# Altium PCB Motion_Board_V2_PCB.PcbDoc (part 1 of 2)
Units mm, origin at the board's own origin, x right, y up, seen from the top; angles counter-clockwise.
Board outline 65.25 x 59.75 mm, 4 copper layers (Top Layer, GND, PWR, Bottom Layer), stack 0.603 mm thick; 136 components, 74 nets, 414 pads, 822 vias.
Unrouted connection lines stored in the file: 41.
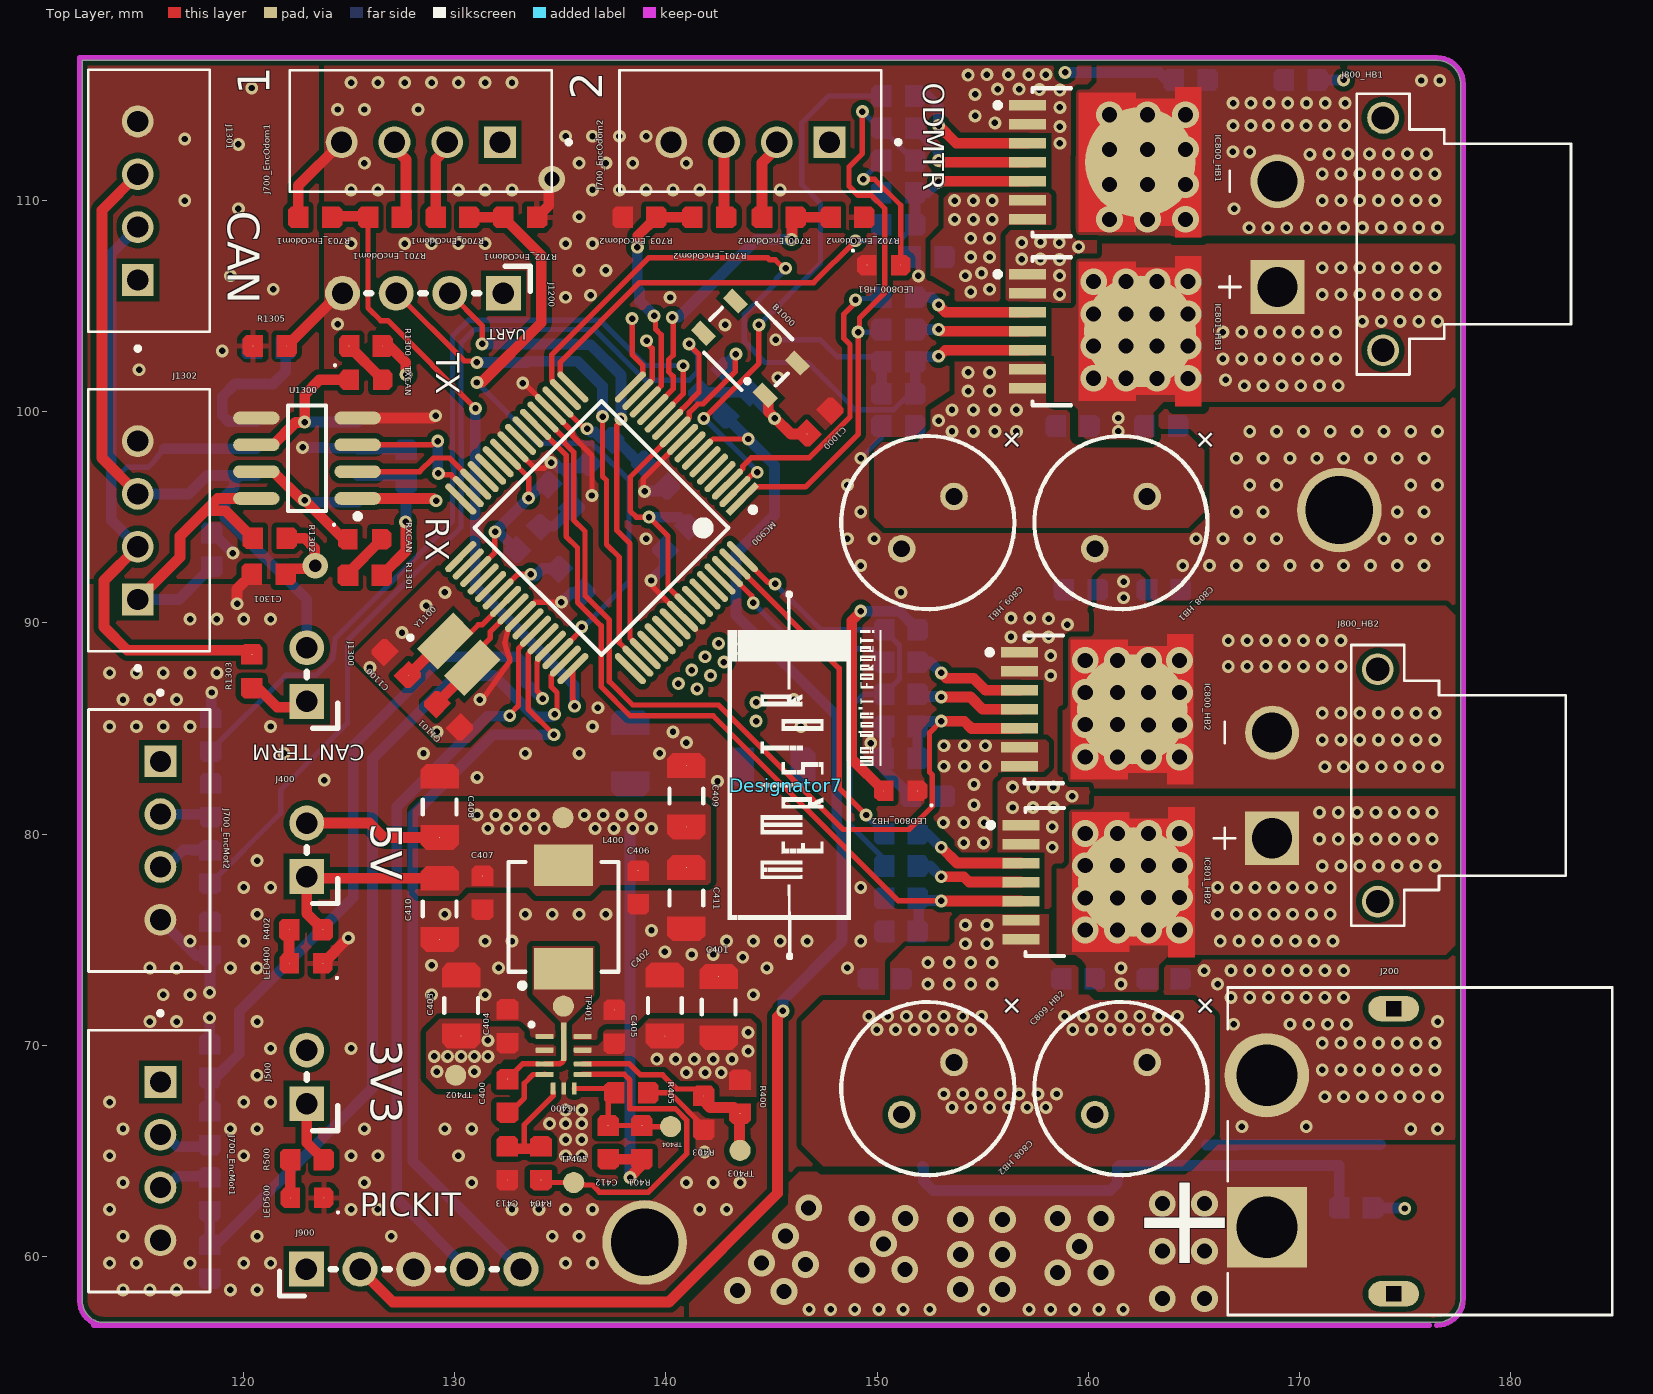
[diagram p0: Top Layer view]
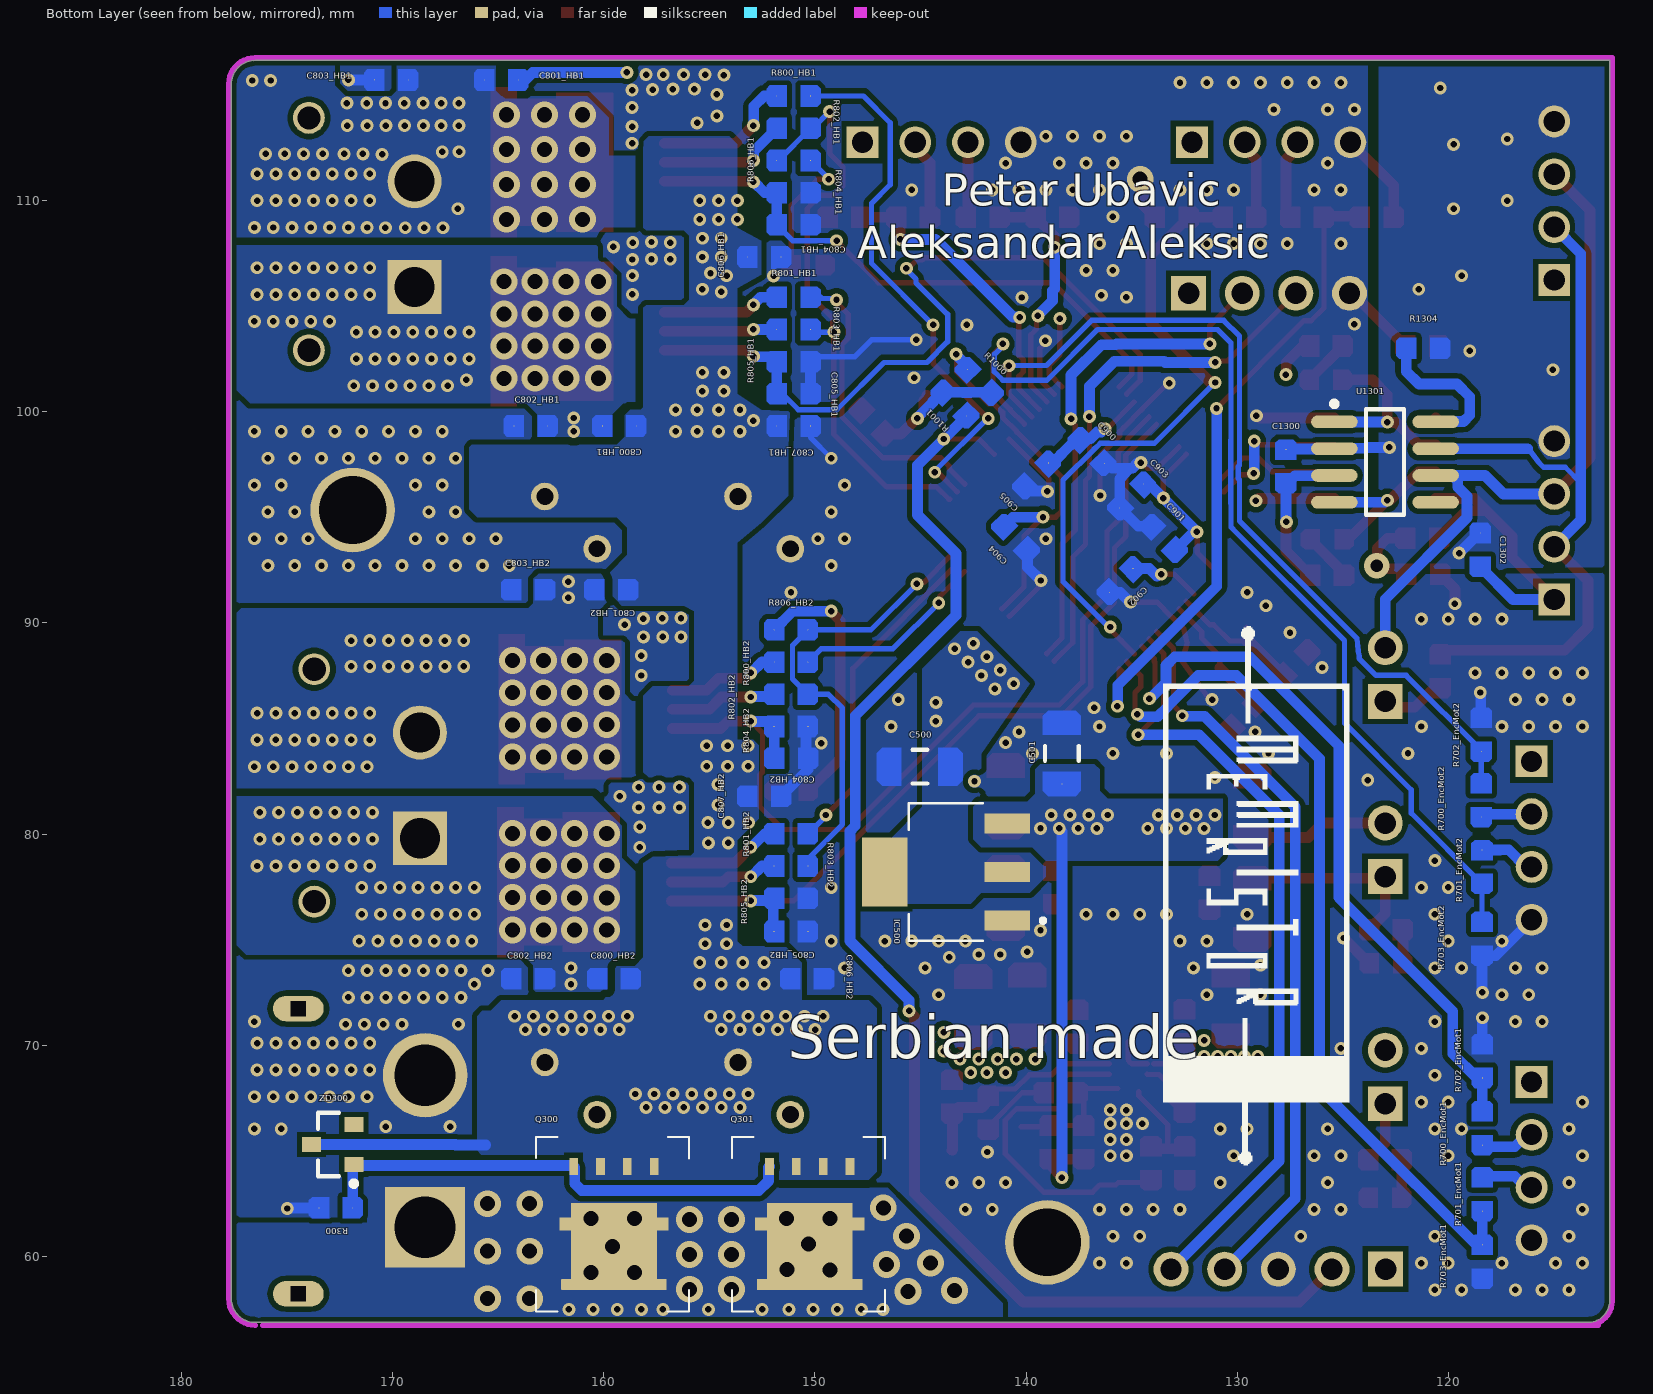
[diagram p1: Bottom Layer view, seen from below]
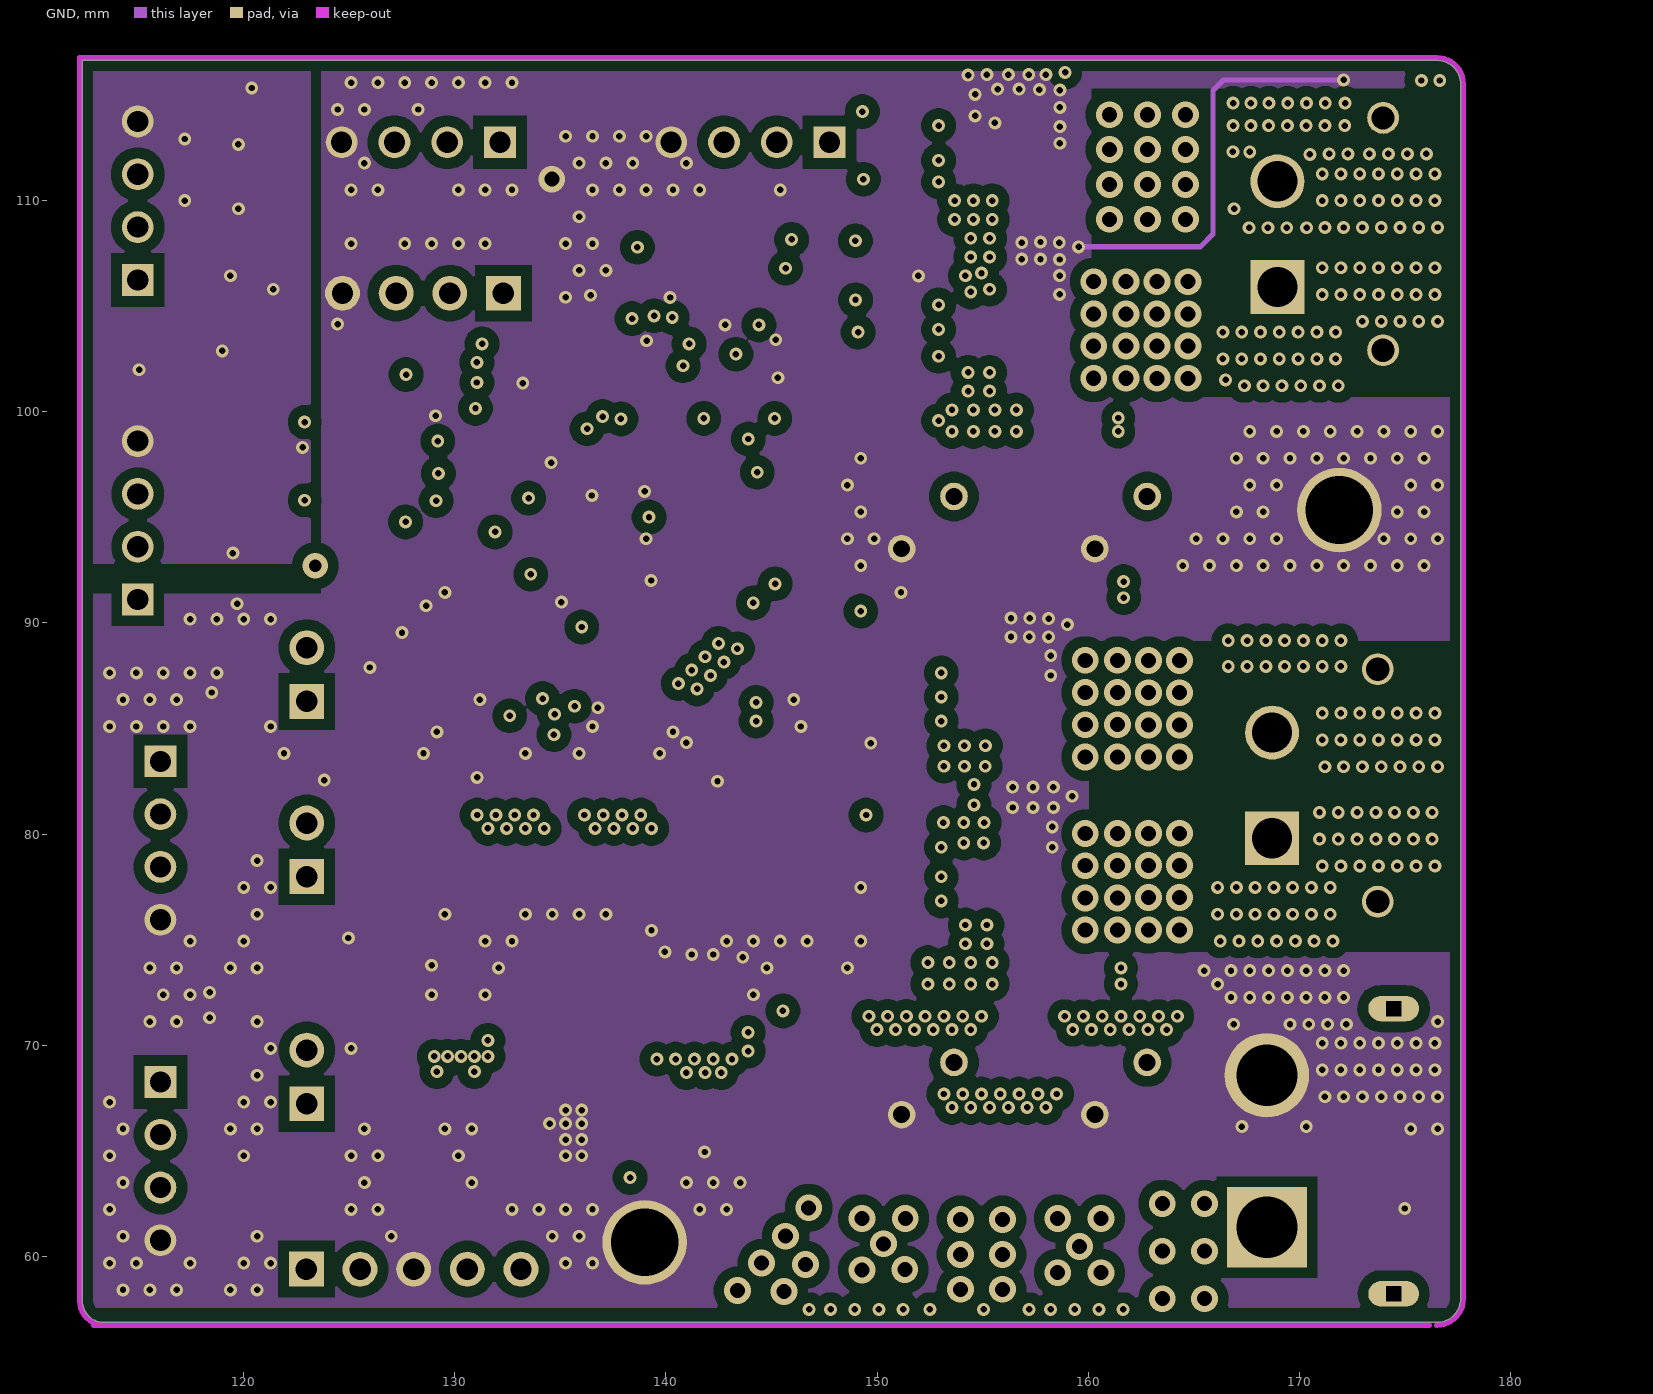
[diagram p2: GND]
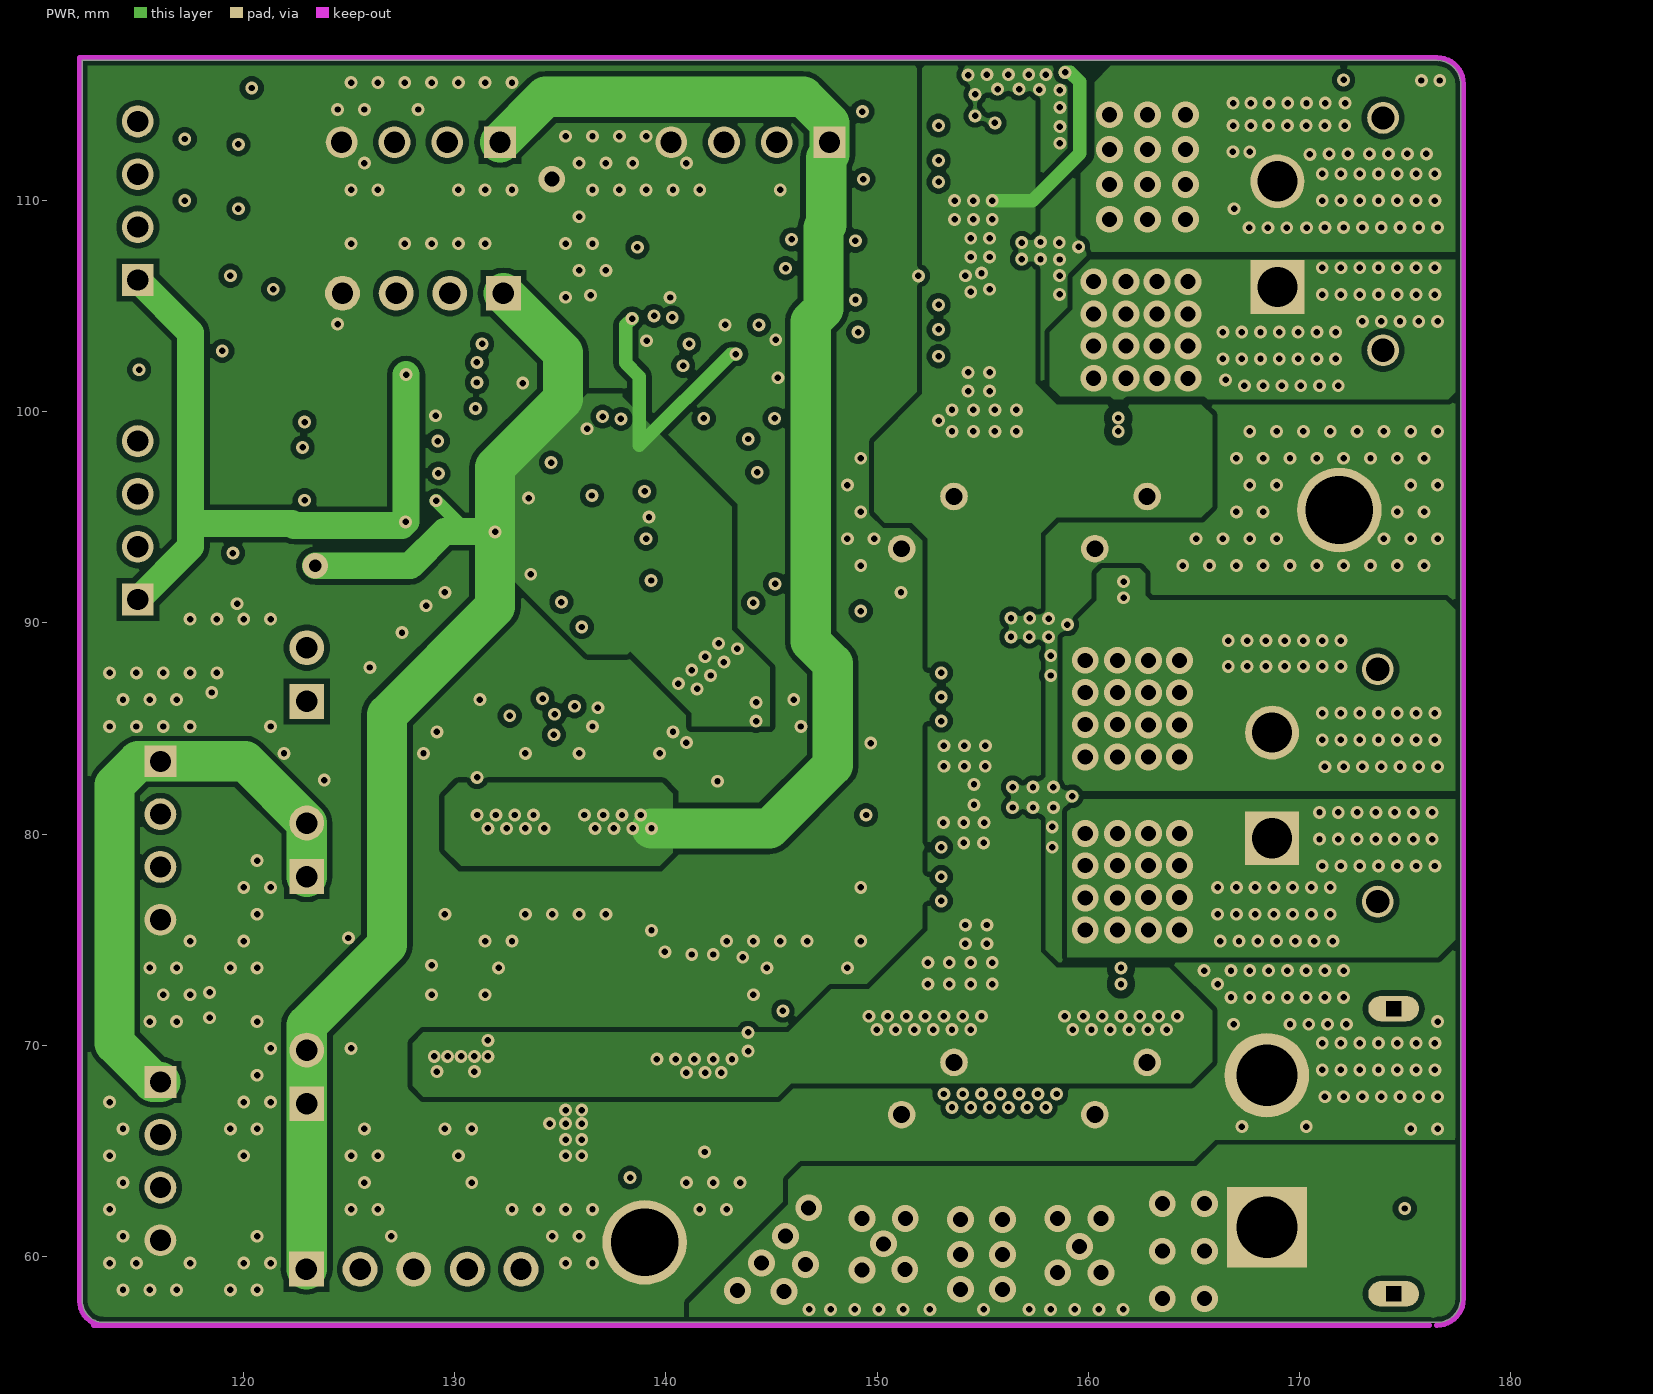
[diagram p3: PWR]
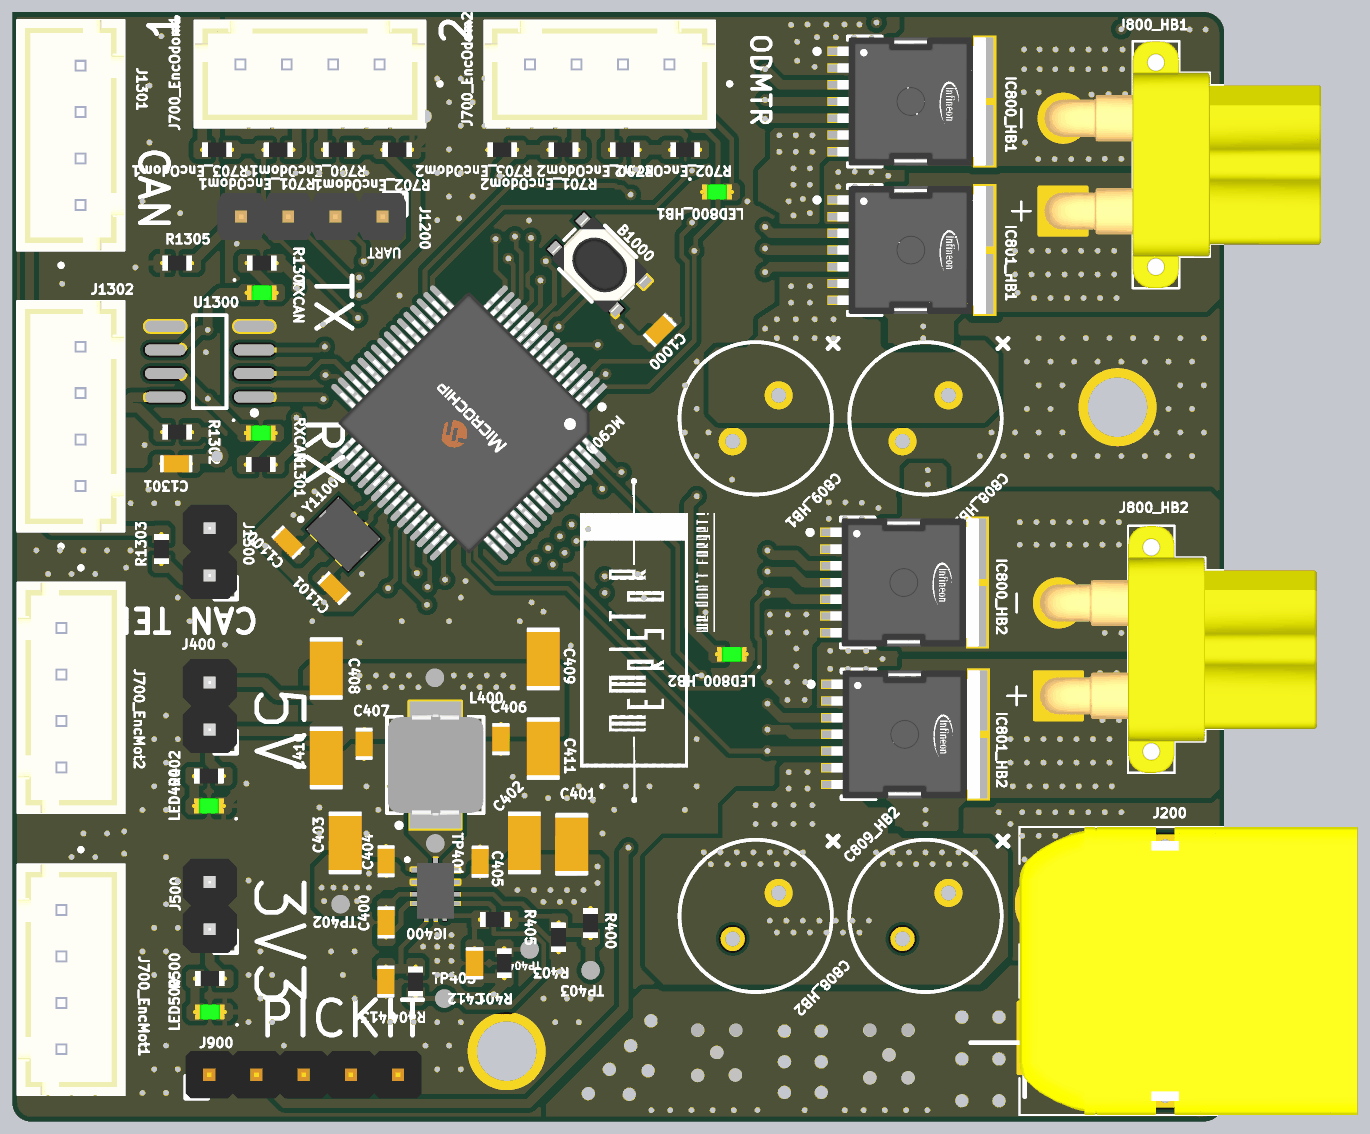
[diagram p5: 3D render of the assembled board from above, using the file's embedded part models]
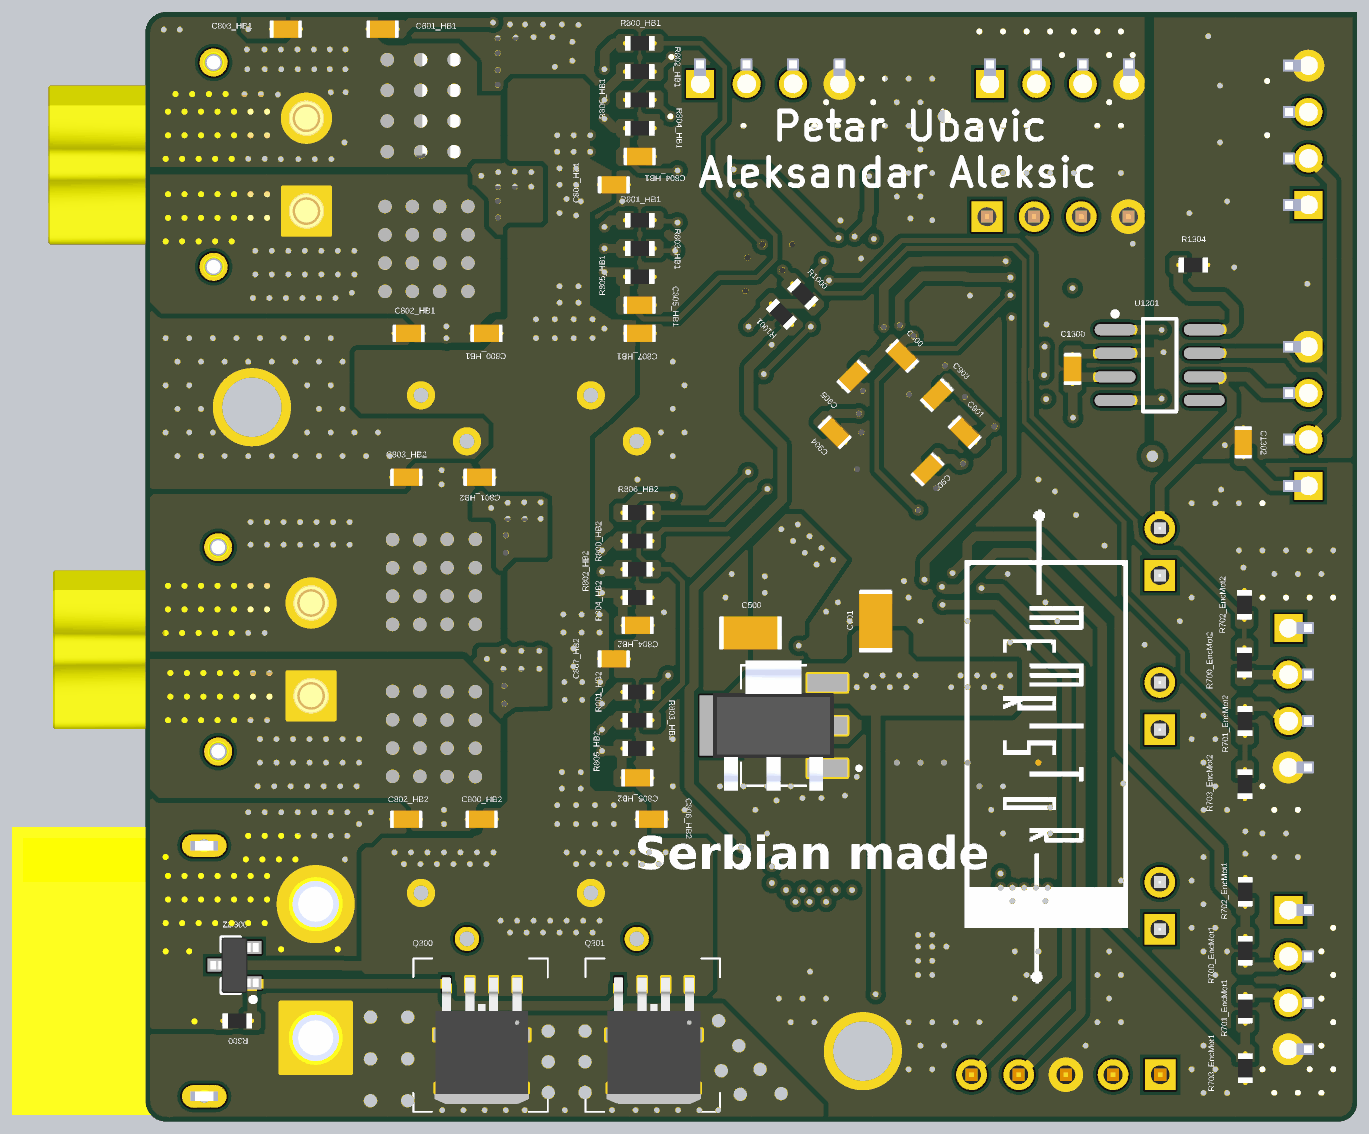
[diagram p6: 3D render of the assembled board from below, using the file's embedded part models]

## Layer stack, top to bottom
Top Solder: solder mask 0.0102, Solder Resist, Dk 3.5
Top Layer: signal copper 0.0356
Dielectric 2: prepreg 0.0711, PP-006, Dk 4.1
GND: signal copper 0.035
Dielectric 1: dielectric 0.32, FR-4, Dk 4.8
PWR: signal copper 0.035
Dielectric 3: prepreg 0.0711, PP-006, Dk 4.1
Bottom Layer: signal copper 0.0356
Bottom Solder: solder mask 0.0102, Solder Resist, Dk 3.5

## Board outline
112.377,57.9 ccw(c113.4,57.9) 113.4,56.877 176.5,56.877 ccw(c176.5,58) 177.623,58 177.623,115.5 ccw(c176.5,115.5) 176.5,116.623 112.377,116.623

## Design rules (kind name [scope] priority, off if disabled: settings)
Clearance "PWR clearance" [InNetClass('HIGH_PWR') vs InNetClass('HIGH_PWR')] p1: gap=0.381 ignorepadtopadclearanceinfootprint=FALSE
Clearance "GND Clearance" [OnLayer('GND')] p2: gap=0.508 ignorepadtopadclearanceinfootprint=FALSE
Clearance AleksicClearance [All] p3: gap=0.254 ignorepadtopadclearanceinfootprint=FALSE except(0: Arc-Hole Track-Hole SMDPad-Hole THPad-Hole Via-Hole Fill-Hole Poly-Hole Region-Hole Text-Hole; 0.102: Track-Track; 0.127: Track-SMDPad SMDPad-SMDPad SMDPad-Via; 0.381: Arc-Region Track-Fill Track-Region SMDPad-Fill SMDPad-Region THPad-Fill THPad-Region Via-Fill Via-Region Fill-Fill Fill-Region Poly-Region Region-Region; 0.5: THPad-THPad)
HoleSize [All] p1: absolutevalues=TRUE maxlimit=4 minlimit=0.025 maxpercent=80.000 minpercent=20.000
HoleToHoleClearance [All] p1: gap=0.152 allowstackedmicrovias=TRUE
MinimumSolderMaskSliver [All] p1: minsoldermaskwidth=0.152
PlaneConnect PlaneConnect_1 [InNet('GND')] p1: planeconnectstyle=Relief reliefexpansion=0.508 reliefentries=4 reliefconductorwidth=0.254 reliefairgap=0.254
PolygonConnect PolygonConnectThermalRelief [(InComponent('LED400') OR InComponent('LED500') OR InComponent('R1305') OR InComponent('R702_EncOdom1') OR InComponent('R702_EncOdom2'))] p1: connectstyle=Relief reliefconductorwidth=0.254 reliefentries=4 polygonreliefangle="90 Angle" airgapwidth=0.254
PolygonConnect [All] p2: connectstyle=Direct reliefconductorwidth=0.254 reliefentries=4 polygonreliefangle="90 Angle" airgapwidth=0.254
RoutingVias [All] p1: holewidth=0.711 width=1.27 viastyle="Through Hole" minholewidth=0.305 minwidth=0.61 maxholewidth=0.711 maxwidth=1.27
SilkToSilkClearance [All] p1: silktosilkclearance=0.152
SilkToSolderMaskClearance [IsPad] p1: minsilkscreentomaskgap=0.152 clearancetoexposedcopper=TRUE
SolderMaskExpansion [All] p1: expansion=0.102 istentingtop=FALSE
Width [All] p1: maxlimit=1.905 minlimit=0.152 preferedwidth=1.27 toplayer_maxwidth=0.508 toplayer_prefwidth=0.254 midlayer1_minwidth=0.254 midlayer1_maxwidth=0.762 midlayer1_prefwidth=0.508 midlayer2_minwidth=0.635 bottomlayer_maxwidth=0.508 bottomlayer_prefwidth=0.254 minimp=50.000000 maximp=50.000000 favimp=50.000000
24 further rules are at their usual default settings.

## Classes and differential pairs
net class HIGH_PWR: HBRIN_HB1 MOTOR1_HB1 MOTOR1_HB2 MOTOR2_HB1 MOTOR2_HB2 NetJ200_2
channel class HBridge: HB1 HB2
channel class Encoder: EncMot1 EncMot2 EncOdom1 EncOdom2
net class ISB[1..2]: ISB1 ISB2
net class ISA[1..2]: ISA1 ISA2
net class INH[1..2]: INH1 INH2
net class INB[1..2]: INB1 INB2
net class INA[1..2]: INA1 INA2
component class U_REVERSE_PROTECTION: Q300 Q301 R300 ZD300
component class U_Power: J200
component class U_PIC32MK: C900 C901 C902 C903 C904 C905 J900 MC900
component class U_MCLR: B1000 C1000 R1000 R1001
component class U_LDO: C500 C501 IC500 J500 LED500 R500
component class U_Communication: J1200
component class U_CAN: C1300 C1301 C1302 J1300 J1301 J1302 R1300 R1301 R1302 R1303 R1304 R1305 RXCAN TXCAN U1300 U1301
component class U_5V0_SYS_SUPPLY: C400 C401 C402 C403 C404 C405 C406 C407 C408 C409 C410 C411 C412 C413 IC400 J400 L400 LED400 R400 R401 R402 R403 R404 R405 TP400 TP401 TP402 TP403 TP404 TP405 TP4001
component class Oscillator: C1100 C1101 Y1100
component class HB2: C800_HB2 C801_HB2 C802_HB2 C803_HB2 C804_HB2 C805_HB2 C806_HB2 C807_HB2 C808_HB2 C809_HB2 IC800_HB2 IC801_HB2 J800_HB2 LED800_HB2 R800_HB2 R801_HB2 R802_HB2 R803_HB2 R804_HB2 R805_HB2 R806_HB2
component class HB1: C800_HB1 C801_HB1 C802_HB1 C803_HB1 C804_HB1 C805_HB1 C806_HB1 C807_HB1 C808_HB1 C809_HB1 IC800_HB1 IC801_HB1 J800_HB1 LED800_HB1 R800_HB1 R801_HB1 R802_HB1 R803_HB1 R804_HB1 R805_HB1 R806_HB1
component class EncOdom2: J700_EncOdom2 R700_EncOdom2 R701_EncOdom2 R702_EncOdom2 R703_EncOdom2
component class EncOdom1: J700_EncOdom1 R700_EncOdom1 R701_EncOdom1 R702_EncOdom1 R703_EncOdom1
component class EncMot2: J700_EncMot2 R700_EncMot2 R701_EncMot2 R702_EncMot2 R703_EncMot2
component class EncMot1: J700_EncMot1 R700_EncMot1 R701_EncMot1 R702_EncMot1 R703_EncMot1

## Components (designator, comment, footprint, x,y, rotation, side; value= is the part's Value field where it differs from the comment)
B1000 "434133025816" 434133025816 144,103 r135 top
C400 "0.1uF" CAP_0603 132.5,67.6 r90 top
C401 "10uF" CAP_1206 142.494,71.808 r270 top
C402 "10uF" CAP_1206 139.954,71.882 r270 top
C403 "10uF" CAP_1206 130.302,71.882 r270 top
C404 "0.1uF" CAP_0603 132.5,70.9 r270 top
C405 "0.1uF" CAP_0603 137.562,70.875 r270 top
C406 "100nf" CAP_0603 138.684,77.47 r90 top
C407 "100nf" CAP_0603 131.318,77.216 r90 top
C408 "22uF" CAP_1206 129.286,81.28 r270 top
C409 "22uF" CAP_1206 140.97,81.788 r270 top
C410 "22uF" CAP_1206 129.286,76.454 r90 top
C411 "22uF" CAP_1206 140.97,76.962 r90 top
C412 "82pF" CAP_0603 137.262,65.4 r270 top
C413 "1uf" CAP_0603 132.487,64.415 r90 top
C500 "1uF" CAP_1206 145.034,83.185 r180 bottom
C501 "1uF" CAP_1206 138.303,83.82 r90 bottom
C800_HB1 "10nF" CAP_0603 159.258,99.314 r180 bottom (schematic designator C800)
C800_HB2 "10nF" CAP_0603 159.512,73.152 r180 bottom (schematic designator C800)
C801_HB1 "10nF" CAP_0603 164.846,115.697 r180 bottom (schematic designator C801)
C801_HB2 "10nF" CAP_0603 159.639,91.567 r180 bottom (schematic designator C801)
C802_HB1 "10nF" CAP_0603 163.449,99.314 r180 bottom (schematic designator C802)
C802_HB2 "10nF" CAP_0603 163.576,73.152 r180 bottom (schematic designator C802)
C803_HB1 "10nF" CAP_0603 170.053,115.697 r180 bottom (schematic designator C803)
C803_HB2 "10nF" CAP_0603 163.576,91.567 r180 bottom (schematic designator C803)
C804_HB1 "1nF" CAP_0603 151.003,108.839 r0 bottom (schematic designator C804)
C804_HB2 "1nF" CAP_0603 151.117,83.591 r0 bottom (schematic designator C804)
C805_HB1 "1nF" CAP_0603 151.003,100.838 r0 bottom (schematic designator C805)
C805_HB2 "1nF" CAP_0603 151.13,75.387 r0 bottom (schematic designator C805)
C806_HB1 "100nf" CAP_0603 152.4,107.315 r0 bottom (schematic designator C806)
C806_HB2 "100nf" CAP_0603 150.368,73.152 r0 bottom (schematic designator C806)
C807_HB1 "10uF" CAP_0603 151.003,99.314 r0 bottom (schematic designator C807)
C807_HB2 "10uF" CAP_0603 152.4,81.788 r0 bottom (schematic designator C807)
C808_HB1 "470uF 25V" WCAP-ATG5_8X11.5(DXL) 161.544,94.742 r45 top locked (schematic designator C808)
C808_HB2 "470uF 25V" WCAP-ATG5_8X11.5(DXL) 152.4,67.95 r45 top locked (schematic designator C808)
C809_HB1 "470uF 25V" WCAP-ATG5_8X11.5(DXL) 152.4,94.742 r45 top locked (schematic designator C809)
C809_HB2 "470uF 25V" WCAP-ATG5_8X11.5(DXL) 161.544,67.95 r45 top locked (schematic designator C809)
C900 "100nf" CAP_0603 136.875,98.1 r45 bottom
C901 "100nf" CAP_0603 133.5,94 r225 bottom
C902 "100nf" CAP_0603 135.5,92 r135 bottom
C903 "100nf" CAP_0603 135,96 r135 bottom
C904 "100nf" CAP_0603 140.5,94 r45 bottom
C905 "100nf" CAP_0603 139.5,97 r135 bottom
C1000 "100nf" CAP_0603 147.25,99.5 r225 top
C1100 "10pF" CAP_0603 127.234,88.066 r135 top
C1101 "10pF" CAP_0603 129.7,85.6 r315 top
C1300 "100nf" CAP_0603 127.7,97.4 r270 bottom
C1301 "100nf" CAP_0603 121.2,92.3 r0 top
C1302 "100nf" CAP_0603 118.5,93.45 r270 bottom
Designator7 "Comment" Memristor_LOGO_middle 145.7,82.3 r90 top
IC400 "LMR33630CRNXR" VQFN-HR 135.162,69.2 r0 top
IC500 "TLV1117LV33DCYR" VREG_TLV1117LV33DCYR 143.8,78.2 r0 bottom
IC800_HB1 "BTN9970LVAUMA1" FP-PG-HSOF-7-MFG#1 160.804,111.8 r270 top locked (schematic designator IC800)
IC800_HB2 "BTN9970LVAUMA1" FP-PG-HSOF-7-MFG#1 160.425,85.9 r270 top locked (schematic designator IC800)
IC801_HB1 "BTN9970LVAUMA1" FP-PG-HSOF-7-MFG#2 160.804,103.8 r270 top locked (schematic designator IC801)
IC801_HB2 "BTN9970LVAUMA1" FP-PG-HSOF-7-MFG#1 160.475,77.725 r270 top locked (schematic designator IC801)
J200 "XT60 90 Deg" XT60PW-M 176.5,65 r270 top locked
J400 "*" HM1x2 123,79.25 r90 top
J500 "*" HM1x2 123,68.5 r90 top
J700_EncMot1 "4 PIN JST XH 2.5mm pitch" JST4PIN 115.162,64.516 r90 top (schematic designator J700)
J700_EncMot2 "4 PIN JST XH 2.5mm pitch" JST4PIN 115.162,79.691 r90 top (schematic designator J700)
J700_EncOdom1 "4 PIN JST XH 2.5mm pitch" JST4PIN 128.4,113.656 r0 top (schematic designator J700)
J700_EncOdom2 "4 PIN JST XH 2.5mm pitch" JST4PIN 144,113.656 r0 top (schematic designator J700)
J800_HB1 "XT30PW-F" AMASS_XT30PW-F 173.95,108.4 r270 top locked (schematic designator J800)
J800_HB2 "XT30PW-F" AMASS_XT30PW-F 173.7,82.3 r270 top locked (schematic designator J800)
J900 "HEADER5PIN" HEADER5PIN 126.79,59.4 r0 top
J1200 "UART" HM1X4 128.5,105.6 r180 top
J1300 "*" HM1x2 123,87.55 r90 top
J1301 "4 PIN JST XH 2.5mm pitch" JST4PIN 115.906,109.982 r270 top
J1302 "4 PIN JST XH 2.5mm pitch" JST4PIN 115.906,94.85 r270 top
L400 "2.2uH" INDP_518X518 135.15,76.075 r90 top
LED400 "GREEN LED" DIOC1608X04N 122.963,73.875 r0 top
LED500 "GREEN LED" DIOC1608X04N 123.013,62.775 r0 top
LED800_HB1 "RED LED" DIOC1608X04N-RED 150.299,106.934 r180 top (schematic designator LED800)
LED800_HB2 "RED LED" DIOC1608X04N-RED 151.13,82.042 r0 top (schematic designator LED800)
MC900 "PIC32MK1024MCF064" PIC32MK_64-TQFP 137,94.5 r225 top
Q300 "SQJ659EP PMOS" "PowerPAK SO-8L SINGLE" 159.512,61.468 r0 bottom
Q301 "SQJ659EP PMOS" "PowerPAK SO-8L SINGLE" 150.241,61.468 r0 bottom
R300 "47kOhm" RES_0603 172.675,62.3 r180 bottom
R400 "71.5kOhm" RES_0603 143.51,67.564 r90 top
R401 "100Kohm" RES_0603 138.862,65.4 r270 top
R402 "150" RES_0603 122.963,75.475 r0 top
R403 "10Kohm" RES_0603 141.787,66.8 r90 top
R404 "100Kohm" RES_0603 134.087,64.415 r90 top
R405 "24.9kOhm" RES_0603 138.362,67.75 r180 top
R500 "68" RES_0603 123.013,64.575 r0 top
R700_EncMot1 "2k" RES_0603 118.4,66.075 r270 bottom (schematic designator R700)
R700_EncMot2 "2k" RES_0603 118.45,81.6 r270 bottom (schematic designator R700)
R700_EncOdom1 "2k" RES_0603 129.9,109.2 r180 top (schematic designator R700)
R700_EncOdom2 "2k" RES_0603 145.35,109.2 r180 top (schematic designator R700)
R701_EncMot1 "2k" RES_0603 118.4,62.95 r90 bottom (schematic designator R701)
R701_EncMot2 "2k" RES_0603 118.418,78.441 r90 bottom (schematic designator R701)
R701_EncOdom1 "2k" RES_0603 126.7,109.2 r0 top (schematic designator R701)
R701_EncOdom2 "2k" RES_0603 142.05,109.2 r0 top (schematic designator R701)
R702_EncMot1 "3k9" RES_0603 118.4,69.25 r270 bottom (schematic designator R702)
R702_EncMot2 "3k9" RES_0603 118.45,84.7 r270 bottom (schematic designator R702)
R702_EncOdom1 "3k9" RES_0603 133.1,109.2 r180 top (schematic designator R702)
R702_EncOdom2 "3k9" RES_0603 148.6,109.2 r180 top (schematic designator R702)
R703_EncMot1 "3k9" RES_0603 118.4,59.75 r90 bottom (schematic designator R703)
R703_EncMot2 "3k9" RES_0603 118.418,75.041 r90 bottom (schematic designator R703)
R703_EncOdom1 "3k9" RES_0603 123.4,109.2 r0 top (schematic designator R703)
R703_EncOdom2 "3k9" RES_0603 138.75,109.2 r0 top (schematic designator R703)
R800_HB1 "1k" RES_0603 151.003,114.935 r180 bottom (schematic designator R800)
R800_HB2 "1k" RES_0603 151.13,88.138 r180 bottom (schematic designator R800)
R801_HB1 "1k" RES_0603 151.003,105.41 r180 bottom (schematic designator R801)
R801_HB2 "1k" RES_0603 151.13,80.01 r180 bottom (schematic designator R801)
R802_HB1 "1k" RES_0603 151.003,113.411 r180 bottom (schematic designator R802)
R802_HB2 "1k" RES_0603 151.13,86.614 r180 bottom (schematic designator R802)
R803_HB1 "1k" RES_0603 151.003,103.886 r180 bottom (schematic designator R803)
R803_HB2 "1k" RES_0603 151.13,78.486 r180 bottom (schematic designator R803)
R804_HB1 "1k" RES_0603 151.003,110.363 r180 bottom (schematic designator R804)
R804_HB2 "1k" RES_0603 151.13,85.09 r180 bottom (schematic designator R804)
R805_HB1 "1k" RES_0603 151.003,102.362 r180 bottom (schematic designator R805)
R805_HB2 "1k" RES_0603 151.13,76.962 r180 bottom (schematic designator R805)
R806_HB1 "1k" RES_0603 151.003,111.887 r180 bottom (schematic designator R806)
R806_HB2 "1k" RES_0603 151.13,89.662 r0 bottom (schematic designator R806)
R1000 "10k" RES_0603 142.219,101.43 r45 bottom
R1001 "1k" RES_0603 143.375,100.35 r45 bottom
R1300 "1k" RES_0603 125.8,103.1 r0 top
R1301 "1k" RES_0603 125.75,92.25 r0 top
R1302 "0" RES_0603 121.25,94 r180 top
R1303 "120" RES_0603 120.4,87.7 r270 top
R1304 "10k" RES_0603 121.2,103 r0 bottom
R1305 "0" RES_0603 121.25,103.1 r0 top
RXCAN "GREEN LED" DIOC1608X04N 125.75,93.95 r180 top
TP400 "Test point" TestPoint#1 135.128,80.772 r0 top
TP401 "Test point" TestPoint#2 135.375,71.775 r180 top
TP402 "Test point" TestPoint#1 130.048,68.58 r315 top
TP403 "Test point" TestPoint#1 143.51,65.024 r45 top
TP404 "Test point" TestPoint#1 140.227,66.148 r315 top
TP405 "Test point" TestPoint#1 135.636,63.5 r225 top
TXCAN "GREEN LED" DIOC1608X04N 125.8,101.5 r180 top
U1300 "ADUM1201BRZ-RL7" SOIC-8 123,97.8 r180 top
U1301 "SN65HVD230DR" SOIC-8 123,97.6 r180 bottom
Y1100 "CG04874-8M" XTALDFN320X250X100-2N 130.2,88.5 r315 top
ZD300 "DZ23C15-E3-08 Zener Diode" SOT95P245X96-3N 172.825,65.3 r0 bottom

## Footprints (in the part's own frame and the unit in brackets; to place one, negate y for a bottom-side part, rotate by r counter-clockwise, add the part's x,y. Pads: shape width x height; smd on the part's side, far side on the other; paste and mask are expansions set on the pad)
434133025816 [mm]
  rect 1.05x0.65 smd: 1(-2.075,1.075) 2(2.075,1.075) 3(-2.075,-1.075) 4(2.075,-1.075)
  silkscreen extent -2.1,-1.7 2.3,1.7, body extent -2.27,-1.6 2.27,1.6, height 2.5
AMASS_XT30PW-F [mm]
  round 2.55 hole 1.9: N(-2.5,-5)
  rect 2.55x2.55 hole 1.9: P(2.5,-5)
  round 1.508 hole 1.1: S1(5.5,0) S2(-5.5,0)
  silkscreen extent -6.65,-7.75 6.65,8.9, body extent -6.65,-6 6.65,8.9, height 5
CAP_0603 [mil] "Chip Capacitor, 2-Leads, Body 1.60x0.80mm, IPC Medium Density"
  round 1 smd: 1(-31.5,0) 2(31.5,0)
  Top Layer region: -50.2,-13.8 -50.2,13.8 -44.31,19.69 -12.8,19.69 -12.8,-19.69 -44.31,-19.69
  Top Layer region: 12.8,-19.69 12.8,19.69 44.31,19.69 50.2,13.8 50.2,-13.8 44.31,-19.69
  body extent -34,-19 34,19, height 31
CAP_1206 [mil] "Chip Capacitor, 2-Leads, Body 3.20x1.60mm, IPC Medium Density"
  round 1 smd: 1(-57.09,0) 2(57.09,0)
  Top Layer region: -79.72,-25.28 -79.72,25.28 -69.57,35.43 -34.45,35.43 -34.45,-35.43 -69.57,-35.43
  Top Layer region: 34.45,-35.43 34.45,35.43 69.57,35.43 79.72,25.28 79.72,-25.28 69.57,-35.43
  silkscreen extent -14,-31 14,31, body extent -67,-35 67,35, height 35
DIOC1608X04N [mil] "Chip Diode, 2-Leads, Body 1.60x0.80mm, IPC Medium Density"
  round 1 smd: 1(-31.5,0) 2(31.5,0)
  Top Layer region: 13.78,-18.7 42.13,-18.7 49.21,-11.61 49.21,11.61 42.13,18.7 13.78,18.7
  Top Layer region: -49.21,-11.61 -42.13,-18.7 -13.78,-18.7 -13.78,18.7 -42.13,18.7 -49.21,11.61
  silkscreen extent 56,-29 60,-25, body extent -31,-16 31,16, height 31
DIOC1608X04N-RED [mil] "Chip Diode, 2-Leads, Body 1.60x0.80mm, IPC Medium Density"
  round 1 smd: 1(-32.24,0) 2(30.75,0)
  Top Layer region: 13.03,-18.7 41.38,-18.7 48.46,-11.61 48.46,11.61 41.38,18.7 13.03,18.7
  Top Layer region: -49.96,-11.61 -42.87,-18.7 -14.53,-18.7 -14.53,18.7 -42.87,18.7 -49.96,11.61
  silkscreen extent 55,-29 59,-25, body extent -32,-16 31,16, height 31
FP-PG-HSOF-7-MFG#1 [mm]
  rect 0.5x1.75 smd paste-1000 mask+0: 1(-2.7,-3.675) 2(-1.8,-3.675) 3(-0.9,-3.675) 4(0,-3.675) 5(0.9,-3.675) 6(1.8,-3.675) 7(2.7,-3.675)
  round 5.22 smd paste-1000 mask+0: 8(0,1.65)
  Top Layer region: -3.3,-1.25 3.3,-1.25 3.3,1.45 3,1.45 3,3.3 3.55,3.3 3.55,4.55 -3.55,4.55 -3.55,3.3 -3,3.3 -3,1.45 -3.3,1.45
  silkscreen extent -3.5,-5.22 3.5,-1.63, body extent -3.65,-4.65 3.65,4.65, height 0.25
FP-PG-HSOF-7-MFG#2 [mm]
  rect 0.5x1.75 smd paste-1000 mask+0: 1(-2.7,-3.675) 2(-1.8,-3.675) 3(-0.9,-3.675) 4(0,-3.675) 5(0.9,-3.675) 6(1.8,-3.675) 7(2.7,-3.675)
  round 5.3 smd paste-1000 mask+0: 8(0,1.65)
  Top Layer region: -3.3,-1.25 3.3,-1.25 3.3,1.45 3,1.45 3,3.3 3.55,3.3 3.55,4.55 -3.55,4.55 -3.55,3.3 -3,3.3 -3,1.45 -3.3,1.45
  silkscreen extent -3.5,-5.22 3.5,-1.63, body extent -3.65,-4.65 3.65,4.65, height 0.25
HEADER5PIN [mil]
  rect 65x65 hole 40: 1(-150,0)
  round 65 hole 40: 2(-50,0) 3(50,0) 4(150,0) 5(250,0)
  silkscreen extent -200,-50 105,0, body extent -200,-50 300,50, height 350
HM1x2 [mil]
  rect 65x65 hole 40: 1(-50,0)
  round 65 hole 40: 2(50,0)
  silkscreen extent -100,-57 5,0, body extent -100,-57 100,57, height 335
HM1X4 [mil]
  rect 65x65 hole 40: 1(-150,0)
  round 65 hole 40: 2(-50,0) 3(50,0) 4(150,0)
  silkscreen extent -200,-50 105,0, body extent -200,-50 200,50, height 336
INDP_518X518 [mm]
  rect 1.95x2.8 smd: 1(-2.45,0) 2(2.45,0)
  silkscreen extent -3.37,-2.6 2.6,2.6, body extent -2.73,-2.59 2.73,2.56, height 1.95
JST4PIN [mm]
  rect 1.508x1.508 hole 1: 1(3.75,-0.906)
  round 1.508 hole 1: 2(1.25,-0.906) 3(-1.25,-0.906) 4(-3.75,-0.906)
  silkscreen extent -6.2,-3.26 7.1,2.49, body extent -6.2,-3.26 6.2,2.49, height 7
Memristor_LOGO_middle [mm]
  silkscreen extent -8.26,-4.5 9.22,2.74
PIC32MK_64-TQFP [mil] "PIC32MK1024MCM064 / & / PIC32MK1024MCF064 / 64-TQFP Package"
  rect 76.98x12.3 smd paste+0 mask+0: 1(-222.03,146.54)
  rrect100% 76.98x12.3 smd paste+0 mask+0: 2(-222.03,126.85) 3(-222.03,107.17) 4(-222.03,87.48) 5(-222.03,67.8) 6(-222.03,48.11) 7(-222.03,28.43) 8(-222.03,8.74) 9(-222.03,-10.94) 10(-222.03,-30.63) 11(-222.03,-50.32) 12(-222.03,-70) 13(-222.03,-89.69) 14(-222.03,-109.37) 15(-222.03,-129.06) 16(-222.03,-148.74) 33(224.86,-148.74) 34(224.86,-129.06) 35(224.86,-109.37) 36(224.86,-89.69) 37(224.86,-70) 38(224.86,-50.32) 39(224.86,-30.63) 40(224.86,-10.94) 41(224.86,8.74) 42(224.86,28.43) 43(224.86,48.11) 44(224.86,67.8) 45(224.86,87.48) 46(224.86,107.17) 47(224.86,126.85) 48(224.86,146.54)
  rrect100% 12.3x76.98 smd paste+0 mask+0: 17(-146.22,-224.55) 18(-126.54,-224.55) 19(-106.85,-224.55) 20(-87.17,-224.55) 21(-67.48,-224.55) 22(-47.8,-224.55) 23(-28.11,-224.55) 24(-8.43,-224.55) 25(11.26,-224.55) 26(30.94,-224.55) 27(50.63,-224.55) 28(70.31,-224.55) 29(90,-224.55) 30(109.68,-224.55) 31(129.37,-224.55) 32(149.06,-224.55) 49(149.06,222.34) 50(129.37,222.34) 51(109.68,222.34) 52(90,222.34) 53(70.31,222.34) 54(50.63,222.34) 55(30.94,222.34) 56(11.26,222.34) 57(-8.43,222.34) 58(-28.11,222.34) 59(-47.8,222.34) 60(-67.48,222.34) 61(-87.17,222.34) 62(-106.85,222.34) 63(-126.54,222.34) 64(-146.22,222.34)
  silkscreen extent -227,-168 169,179, body extent -280,-283 283,281, height 10
"PowerPAK SO-8L SINGLE" [mm]
  rrect0% 0.595x0.61 smd: D(-2.286,-0.076) D(2.286,-0.076)
  rrect10% 5x0.51 smd: D(0,2.794)
  rrect0% 4.061x3.63 smd: D(0,0.762)
  rrect0% 0.41x0.82 smd: G(1.905,-2.791) S(-1.905,-2.791) S(-0.635,-2.791) S(0.635,-2.794)
  silkscreen extent -3.56,-4.19 3.68,4.06, body extent -2.54,-3.15 2.54,3.66, height 1.2
RES_0603 [mil] "Chip Resistor, 2-Leads, Body 1.60x0.80mm, IPC Medium Density"
  round 1 smd: 1(-31.5,0) 2(31.5,0)
  Top Layer region: 12.8,-19.69 12.8,19.69 44.31,19.69 50.2,13.8 50.2,-13.8 44.31,-19.69
  Top Layer region: -50.2,-13.8 -50.2,13.8 -44.31,19.69 -12.8,19.69 -12.8,-19.69 -44.31,-19.69
  body extent -31,-16 31,16, height 18
SOIC-8 [mm]
  oval 2.2x0.6 smd: 1(-2.409,1.914) 2(-2.409,0.644) 3(-2.409,-0.626) 4(-2.409,-1.896) 5(2.391,-1.896) 6(2.391,-0.626) 7(2.391,0.644) 8(2.391,1.914)
  silkscreen extent -2.53,-2.49 0.89,2.89, body extent -2.84,-2.45 2.93,2.45, height 1.45
SOT95P245X96-3N [mm] "SOT23, 3-Leads, Body 2.90x2.45mm, Pitch 0.95mm, IPC Medium Density"
  rect 0.9x0.7 smd: 1(-1,0.95) 2(-1,-0.95) 3(1,0)
  silkscreen extent -1.12,-1.5 0.7,1.97, body extent -1.3,-1.5 1.3,1.5, height 0.96
TestPoint#1 [mm] "1mm"
  round 1 smd mask+0: 1(0,0)
TestPoint#2 [mm] "1mm"
  round 1 smd mask+0: 1(0.225,-0.076)
VQFN-HR [mm]
  rrect25% 0.85x0.25 smd mask+0.07: 1(-0.9,1.219) 2(-0.9,0.569) 10(0.9,0.569) 11(0.9,1.219)
  rrect25% 0.85x0.229 smd mask+0.051: 3(-0.9,-0.081) 9(0.9,-0.081)
  rrect25% 0.85x0.226 smd mask+0.051: 4(-0.9,-0.581) 8(0.9,-0.581)
  rrect25% 0.229x0.559 smd mask+0.051: 5(-0.5,-1.245) 7(0.5,-1.244)
  rrect25% 0.229x0.584 smd mask+0.051: 6(0,-1.245)
  rrect25% 0.25x1.825 smd mask+0.07: 12(0,0.969)
  silkscreen extent -1.58,1.72 -1.46,1.84, body extent -1,-1.4 1,1.6, height 1
VREG_TLV1117LV33DCYR [mm]
  rect 2.15x0.95 smd: 1(-2.9,2.3) 2(-2.9,0) 3(-2.9,-2.3)
  rect 2.15x3.25 smd: 4(2.9,0)
  silkscreen extent -4.7,-3.25 1.75,3.25, body extent -3.5,-3.25 3.5,3.25, height 1.8
WCAP-ATG5_8X11.5(DXL) [mm]
  round 1.308 hole 0.8: 1(1.75,0) 2(-1.75,0)
  silkscreen extent -4.1,-4.1 4.1,4.1, body extent -3.99,-4 3.99,3.98, height 11.39
XT60PW-M [mm] "XT60 90 Deg"
  round 4 hole 2.9: 1(-3.584,-8.048)
  rect 3.8x3.8 hole 2.9: 2(3.616,-8.048)
  oval 1.2x2.4 hole 0.7 square: S1(6.766,-2.048) S2(-6.734,-2.048)
  silkscreen extent -7.73,-9.9 7.77,8.3, body extent -7.73,-9.9 7.77,8.3, height 8.4
XTALDFN320X250X100-2N [mm]
  rect 1.37x2.43 smd: 1(-0.9,0) 2(0.9,0)
  silkscreen extent -2.29,-1.16 -2.09,-0.96, body extent -1.6,-1.25 1.6,1.25, height 1

## Part data
B1000: "<b> WS-TASV J-Bend SMT Tact Switch 4.2x3.2 mm  <br> <br> MATERIAL PROPERTIES  <br><br> </b>Cover Material Stainless Steel  <br> <br> <b>PROPERTIES  <br><br> </b>Actuator Material LCP  <br>Actuator Flammability Rating UL94 V-0  <br>Actuator Color Black; White  <br>Frame Material LCP  <br>Frame Flammability Rating UL94 V-0  <br>Frame Color Black  <br>Contact Material Stainless Steel  <br>Contact Plating Silver  <br>Terminal Material Copper Alloy  <br>Terminal Plating Silver  <br>VR 16 V (DC)  <br>Contact Resistance Initial 500 mÎ©  <br>Contact Resistance After Life Test 1 Î©  <br>RISO 100 MÎ©  <br>Withstanding Voltage 250 V (AC)  <br>Qty. 2900  <br><br> <b>Mechanical Properties</b><br> <br>Stroke  0.2 mm  <br><br> <b>GENERAL INFORMATION  <br><br> </b>Operating Temperature -40 up to +85 Â°C  <br> <br> </b>PACKAGING PROPERTIES  <br><br> </b>Packaging Tape and Reel  <br> <br> <br><a href=\"https://www.we-online.com/catalog/media/o106805v209%20Family_WS-TASV-4341x30258x6_Gruppe.jpg\" title=\"Enlarge picture\"> <img src=\"https://www.we-online.com/catalog/media/o106805v209%20Family_WS-TASV-4341x30258x6_Gruppe.jpg\" width=\"320\"></a><p> Details see: <a href=\"https://www.we-online.com/catalog/en/TASV_4_2X3_2_SMD_J-BEND/\">https://www.we-online.com/catalog/en/TASV_4_2X3_2_SMD_J-BEND/</a><p> </b>Created by Yingchun,Shan 2020-02-20<br> </b>2020(C) Wurth Elektronik", Package=None, Availability=Unavailable, MF="{'manufacturer': u'Wurth Electronics'}", MP=434133025816, Price=None
C400 C404 C405: library part C000018, "CAP CER 0.1UF 50V X7R 0603", DigiKey part number=1276-1000-1-ND, capacitance=0.1uF, ComponentLink1Description=DigiKey, ComponentLink1URL=https://www.digikey.com/en/products/detail/samsung-electro-mechanics/CL10B104KB8NNNC/3886658
C401 C402 C403: library part C000017, "CAP CER 10UF 50V X7R 1206", DigiKey part number=1276-6767-1-ND, capacitance=10uF, ComponentLink1Description=DigiKey, ComponentLink1URL=https://www.digikey.com/en/products/detail/samsung-electro-mechanics/CL31B106KBHNNNE/5961251
C406 C407 C806_HB1 C806_HB2 C900 C901 C902 C903 C904 C905 C1000 C1300 C1301 C1302: library part C000007, "CAP CER 100nF 0603 25V X7R", capaticanse=100nf, ComponentLink1Description=digikey, ComponentLink1URL=https://www.digikey.com/en/products/detail/kyocera-avx/06033C104K4T2A/8019250
C408 C409 C410 C411: library part C000020, "22 µF ±10% 25V Ceramic Capacitor X5R 1206 (3216 Metric)", DigiKey part number=1276-3047-1-ND, capacitance=22uF, ComponentLink1Description=DigiKey, ComponentLink1URL=https://www.digikey.com/en/products/detail/samsung-electro-mechanics/CL31A226KAHNNNE/3888705
C412: library part C000021, "82 pF ±1% 25V Ceramic Capacitor C0G, NP0 0603 (1608 Metric)", DigiKey part number=478-KGM15ACG1E820FTCT-ND, capacitance=82pF, ComponentLink1Description=DigiKey, ComponentLink1URL=https://www.digikey.com/en/products/detail/kyocera-avx/KGM15ACG1E820FT/1599315?s=N4IgjCBcoMxaBjKAzAhgGwM4FMA0IB7KAbXDBggF18AHAFyhAGU6AnASwDsBzEAX3xgALPBBJIaLHkIlwAVgCcAJiEB2ENRD1GLDj36CAbKPGSc%2BIpFIxlQ45u2RmbLrwEglABiEKTKDOYyViAAHEoABDQAYhq0DE4AqpzsdADyyACy2KiYAK6s2AYgALRKfpBsudKWpHIafA1AA
C413: library part C000011, "CAP CER 1uF 10V X7R 0603", DigiKey part number=1276-1946-2-ND, capaticanse=1uf, ComponentLink1Description=digikey, ComponentLink1URL=https://www.digikey.com/en/products/detail/samsung-electro-mechanics/CL10B105KP8NNNC/3887604
C500 C501: library part C000020, "1 µF ±10% 25V Ceramic Capacitor X5R 1206 (3216 Metric)", capacitance=22uF, DigiKey part number=1276-3047-1-ND, ComponentLink1Description=DigiKey, ComponentLink1URL=https://www.digikey.com/en/products/detail/samsung-electro-mechanics/CL31A226KAHNNNE/3888705
C800_HB1 C800_HB2 C801_HB1 C801_HB2 C802_HB1 C802_HB2 C803_HB1 C803_HB2: library part C000007, "CAP CER 10nF 0603 25V X7R", capaticanse=100nf, ComponentLink1Description=digikey, ComponentLink1URL=https://www.digikey.com/en/products/detail/kyocera-avx/06033C104K4T2A/8019250
C804_HB1 C804_HB2 C805_HB1 C805_HB2: library part C000021, "CAP CER 1nF 0603 25V X7R", capacitance=82pF, DigiKey part number=478-KGM15ACG1E820FTCT-ND, ComponentLink1Description=DigiKey, ComponentLink1URL=https://www.digikey.com/en/products/detail/kyocera-avx/KGM15ACG1E820FT/1599315?s=N4IgjCBcoMxaBjKAzAhgGwM4FMA0IB7KAbXDBggF18AHAFyhAGU6AnASwDsBzEAX3xgALPBBJIaLHkIlwAVgCcAJiEB2ENRD1GLDj36CAbKPGSc%2BIpFIxlQ45u2RmbLrwEglABiEKTKDOYyViAAHEoABDQAYhq0DE4AqpzsdADyyACy2KiYAK6s2AYgALRKfpBsudKWpHIafA1AA
C807_HB1 C807_HB2: library part C000007, "CAP CER 10uF 0603 25V X7R", capaticanse=100nf, ComponentLink1Description=digikey, ComponentLink1URL=https://www.digikey.com/en/products/detail/kyocera-avx/06033C104K4T2A/8019250
C808_HB1 C808_HB2 C809_HB1 C809_HB2: library part WCAP-ATG5_8X11.5, "<b>WCAP-ATG5 Aluminium Electrolytic Capacitors </B><BR><BR> <B>General Purpose +105 Â°C </B><BR><BR> <B>Characteristics</B><BR> <BR>General purpose product series with max. operating temperature of +105 Â°C  <BR>Mounting style: THT Radial  <BR>Capacitance range: 0.1 ÂµF â€’ 18000 ÂµF  <BR>Capacitance tolerance: Â±20 %  <BR>Operating temperature:  <BR>-40 Â°C up to +105 Â°C for UR < 400 V(DC)  <BR>-25 Â°C up to +105 Â°C for UR â‰¥ 400 V(DC)  <BR>Endurance: 2000 h @ +105 Â°C  <BR>Dimensions (DxL) in mm: 5.0 x 11.0 up to 22.0 x 31.0  <BR>Recommended soldering: Wave soldering  <BR> <BR> <B>Applications</B><BR> <BR>Filtering  <BR>Smoothing  <BR>Energy storage  <BR>Coupling  e.g. Switched-mode power supply, AC/DC converter, adapter, charger, digital camera  <BR> <BR><BR> <BR> <br><a href=\"https://www.we-online.com/catalog/media/o683503v209%20family-wcap-atg5-860020672004.jpg\" title=\"Enlarge picture\"> <img src=\"https://www.we-online.com/catalog/media/o683503v209%20family-wcap-atg5-860020672004.jpg\"  width=\"320\"></a><p> </b><br>             Details see: <a href=\"www.we-online.com/catalog/WCAP-ATG5/?utm_source=eagle_model&utm_medium=description_link&utm_campaign=eisos_eagle\">www.we-online.com/catalog/WCAP-ATG5</a><p> Updated by yingchun,Shan;2020-02-28 <br>2020(C) WÃ¼rth Elektronik", Package=None, Availability=Unavailable, MF="{'manufacturer': u'W\xfcrth Elektronik'}", MP=860020474014, Price=None
C1100 C1101: library part C000007, "CAP CER 10pF 0603 25V X7R", capaticanse=100nf, ComponentLink1Description=digikey, ComponentLink1URL=https://www.digikey.com/en/products/detail/kyocera-avx/06033C104K4T2A/8019250
IC400: "Buck Switching Regulator IC Positive Adjustable 1V 1 Output 3A 12-PowerVFQFN", DigiKey part number=296-49768-1-ND, MOUSER Part Number=595-LMR33630CRNXR, ComponentLink1Description=DigiKey, ComponentLink1URL=https://www.digikey.com/en/products/detail/texas-instruments/LMR33630CRNXR/9356579, ComponentLink2Description=Mouser, ComponentLink2URL=https://eu.mouser.com/ProductDetail/Texas-Instruments/LMR33630CRNXR?qs=55YtniHzbhDkvgzAIyvpfQ%3D%3D
IC500: "1-A, low-dropout voltage regulator 4-SOT-223 -40 to 125", Package=None, Availability=Unavailable, MF="{'manufacturer': u'Texas Instruments'}", MP=TLV1117LV33DCYR, Price=None
IC800_HB1 IC800_HB2 IC801_HB1 IC801_HB2: library part CMP-32854-000022-1, "DC_MOTOR_CONTROL PG-HSOF-7"
J200: library part XT60PW-M
J400 J500 J1300: library part HEADER_1x2
J700_EncMot1 J700_EncMot2 J700_EncOdom1 J700_EncOdom2 J1301 J1302: library part JST4PIN
J800_HB1 J800_HB2 Y1100: Package=None, Availability=Unavailable, Price=None
  J800_HB1 J800_HB2: MF="{'manufacturer': u'amass'}", MP=XT30PW-F
  Y1100: MF="{'manufacturer': u'NDK America, Inc.'}", MP=CG04874-8M
J900: "5 PIN Male Header 2.54mm pitch"
J1200: library part HEADER_1x4
L400: library part L000012, "FIXED IND 2.2UH 4.2A 50.1MOHM SM", DigiKey part number=541-1088-1-ND, ComponentLink1Description=DigiKey, ComponentLink1URL=https://www.digikey.com/en/products/detail/vishay-dale/IHLP2020BZER2R2M01/1869311?s=N4IgTCBcDaIJIAkAyAFMAGDAhAWgUQCUwiBZdARhAF0BfIA, inductance=2.2uH
LED400 LED500 RXCAN TXCAN: library part 00000001, "LED GREEN DIFFUSED 0603 SMD", Supplier Part Number 1=Q65111A3964, ComponentLink1Description=Digikey, ComponentLink1URL=https://www.digikey.com/en/products/detail/ams-osram-usa-inc/LG-Q396-PS-35/5249855, Supplier 1=Avnet
LED800_HB1 LED800_HB2: library part 00000008, "LED RED DIFFUSED 0603 SMD", Supplier Part Number 1=Q65111A3964, ComponentLink1Description=Digikey, ComponentLink1URL=https://www.digikey.com/en/products/detail/ams-osram-usa-inc/LG-Q396-PS-35/5249855, Supplier 1=Avnet
MC900: library part PIC32MK, "PIC32 Motor Control Microcontroller / PIC32MK1024MCF064 / PIC32MK1024MCM064 / Compatible"
Q300 Q301: library part 00000005, "P-Channel 60 V 52A (Tc) 83W (Tc) Surface Mount PowerPAK® SO-8", DigiKey part number=SQJ459EP-T1_GE3CT-ND, MOUSER Part Number=78-SQJ459EP-T2_BE3, ComponentLink1Description=DigiKey, ComponentLink1URL=https://www.digikey.com/en/products/detail/vishay-siliconix/SQJ459EP-T1-GE3/6708881, ComponentLink2Description=Mouser, ComponentLink2URL=https://eu.mouser.com/ProductDetail/Vishay-Siliconix/SQJ459EP-T2_BE3?qs=CiayqK2gdcKpg8h0vLRPjA%3D%3D
R300: library part R000010, "47 kOhms ±1% 0.1W, 1/10W Chip Resistor 0603 (1608 Metric) Moisture Resistant Thick Film", DigiKey part number=311-47.0KHRCT-ND, ComponentLink1Description=DigiKey, ComponentLink1URL=https://www.digikey.com/en/products/detail/yageo/RC0603FR-0747KL/727253, resistance=47kOhm
R400: library part R000022, "71.5 kOhms ±1% 0.1W, 1/10W Chip Resistor 0603 (1608 Metric) Moisture Resistant Thick Film", DigiKey part number=311-71.5KHRCT-ND, ComponentLink1Description=DigiKey, ComponentLink1URL=https://www.digikey.com/en/products/detail/yageo/RC0603FR-0771K5L/727370, resistance=71.5kOhm
R401 R404: library part R000006, "RES 100K OHM 1% 1/10W 0603", ComponentLink1Description=digikey, ComponentLink1URL=https://www.digikey.com/en/products/detail/stackpole-electronics-inc/RMCF0603FG100K/1713543, resistance=100Kohm
R402: library part R000004, "RES 150 OHM 1% 1/10W 0603", resistance=1Kohm, ComponentLink1Description=digikey, ComponentLink1URL=https://www.digikey.com/en/products/detail/vishay-beyschlag-draloric-bc-components/MCT06030C1001FP500/2607821
R403: library part R000001, "RES 10K OHM 1% 1/10W 0603", ComponentLink1Description=digikey, ComponentLink1URL=https://www.digikey.com/en/products/detail/vishay-beyschlag-draloric-bc-components/MCT06030C1002FP500/1850440, resistance=10Kohm
R405: library part R000017, "24.9 kOhms ±1% 0.1W, 1/10W Chip Resistor 0603 (1608 Metric) Automotive AEC-Q200 Thick Film", DigiKey part number=P24.9KHCT-ND, ComponentLink1Description=DigiKey, ComponentLink1URL=https://www.digikey.com/en/products/detail/panasonic-electronic-components/ERJ-3EKF2492V/196236, resistance=24.9kOhm
R500: library part R000004, "RES 68 OHM 1% 1/10W 0603", resistance=1Kohm, ComponentLink1Description=digikey, ComponentLink1URL=https://www.digikey.com/en/products/detail/vishay-beyschlag-draloric-bc-components/MCT06030C1001FP500/2607821
R700_EncMot1 R700_EncMot2 R700_EncOdom1 R700_EncOdom2 R701_EncMot1 R701_EncMot2 R701_EncOdom1 R701_EncOdom2: library part R000004, "RES 2k OHM 1% 1/10W 0603", resistance=1Kohm, ComponentLink1Description=digikey, ComponentLink1URL=https://www.digikey.com/en/products/detail/vishay-beyschlag-draloric-bc-components/MCT06030C1001FP500/2607821
R702_EncMot1 R702_EncMot2 R702_EncOdom1 R702_EncOdom2 R703_EncMot1 R703_EncMot2 R703_EncOdom1 R703_EncOdom2: library part R000004, "RES 3k9 OHM 1% 1/10W 0603", resistance=1Kohm, ComponentLink1Description=digikey, ComponentLink1URL=https://www.digikey.com/en/products/detail/vishay-beyschlag-draloric-bc-components/MCT06030C1001FP500/2607821
R800_HB1 R800_HB2 R801_HB1 R801_HB2 R802_HB1 R802_HB2 R803_HB1 R803_HB2 R804_HB1 R804_HB2 R805_HB1 R805_HB2 R806_HB1 R806_HB2 R1300 R1301: library part R000004, "RES 1k OHM 1% 1/10W 0603", resistance=1Kohm, ComponentLink1Description=digikey, ComponentLink1URL=https://www.digikey.com/en/products/detail/vishay-beyschlag-draloric-bc-components/MCT06030C1001FP500/2607821
R1000: library part R000006, "RES 10K OHM 1% 1/10W 0603", resistance=100Kohm, ComponentLink1Description=digikey, ComponentLink1URL=https://www.digikey.com/en/products/detail/stackpole-electronics-inc/RMCF0603FG100K/1713543
R1001: library part R000006, "RES 1K OHM 1% 1/10W 0603", resistance=100Kohm, ComponentLink1Description=digikey, ComponentLink1URL=https://www.digikey.com/en/products/detail/stackpole-electronics-inc/RMCF0603FG100K/1713543
R1302: library part R000004, "RES 0 OHM 1% 1/10W 0603", resistance=1Kohm, ComponentLink1Description=digikey, ComponentLink1URL=https://www.digikey.com/en/products/detail/vishay-beyschlag-draloric-bc-components/MCT06030C1001FP500/2607821
R1303: library part R000004, "RES 120 OHM 1% 1/10W 0603", resistance=1Kohm, ComponentLink1Description=digikey, ComponentLink1URL=https://www.digikey.com/en/products/detail/vishay-beyschlag-draloric-bc-components/MCT06030C1001FP500/2607821
R1304 R1305: library part R000004, "RES 10k OHM 1% 1/10W 0603", resistance=1Kohm, ComponentLink1Description=digikey, ComponentLink1URL=https://www.digikey.com/en/products/detail/vishay-beyschlag-draloric-bc-components/MCT06030C1001FP500/2607821
TP400 TP401 TP402 TP403 TP404 TP405: library part TP002, "Test point 1mm"
U1300: library part ADUM1201BRZ, "DGTL ISO 2.5KV GEN PURP 8SOIC", Package=SOIC-8, Assembly=SMD, Barcode=00000001, Category="Integrated Circuits (ICs)", Datasheet Link=http://www.analog.com/media/en/technical-documentation/data-sheets/ADuM1200_1201.pdf, Family=Comunication, Manufacturer Part Number=ADUM1201BRZ-RL7
U1301: library part SN65HVD230, "IC EMC CAN TRANSCEIVER 8-SOIC", Package=SOIC-8, Assembly=SMD, Barcode=00000001, Category="Integrated Circuits (ICs)", Comet Product Page=http://store.comet.rs/Catalogue/Product/9057/, Datasheet Link=http://www.ti.com/lit/ds/symlink/sn65hvd232.pdf, Family=Comunication, Manufacturer Part Number=SN65HVD230DR
ZD300: library part 00000006, "Zener Diode Array 1 Pair Common Cathode 15 V 300 mW ±5% SOT-23-3", DigiKey part number=112-DZ23C15-E3-08CT-ND, ComponentLink1Description=DigiKey, ComponentLink1URL=https://www.digikey.com/en/products/detail/vishay-general-semiconductor-diodes-division/DZ23C15-E3-08/4831460

## Free pads (board coordinates)
  round 4 hole 3.2: ""(138.992,60.668) ""(171.885,95.339)

## Via types
v1: diameter 0.61, hole 0.305, Top Layer to Bottom Layer, tented both sides, 415 vias
v2: diameter 0.61, hole 0.305, Top Layer to Bottom Layer, 281 vias
v3: diameter 1.27, hole 0.711, Top Layer to Bottom Layer, 84 vias
v4: diameter 0.61, hole 0.305, Top Layer to Bottom Layer, tented bottom, 20 vias
v5: diameter 0.61, hole 0.305, Top Layer to Bottom Layer, tented top, 16 vias
v6: diameter 1.27, hole 0.711, Top Layer to Bottom Layer, tented both sides, 5 vias
v7: diameter 1.219, hole 0.61, Top Layer to Bottom Layer, tented both sides, 1 vias

## Nets (pads, with @x,y where several pads share a name; then routed paths per layer and width w, separated by ;. In a path a pad name is that pad's centre, name@x,y a point inside that pad or via, vN(x,y) a via of type N, cw(c..) or ccw(c..) an arc to the next point about the centre after c; other vN are vias at no path point)
3v3_CAN: C1300.2 C1302.2 J1301.1 J1302.1 R1300.2 R1301.2 R1302.2 U1300.8 U1301.3 | length 58.9
  Top Layer w0.508: J1302.1@115,91.1 117,93.1 117,94.1 118.2,95.3 ; R1302.2@120.45,94 119.15,95.3 118.2,95.3 ; U1300.8@120.609,95.886 118.786,95.886 118.2,95.3 ; R1301.2@126.55,92.25 127.7,93.4 127.7,93.908 127.694,93.914 127.694,94.756 v1(127.675,94.775) ; R1300.2@126.6,103.1 126.9,103.1 127.681,102.319 127.681,101.769 v1(127.7,101.75)
  PWR w1.27: J1302.1@115,91.1 117.5,93.6 117.5,94.7 ; J1301.1@115,106.232 117.5,103.732 117.5,94.7 ; v1(127.7,101.75) 127.7,94.8 127.506,94.606 122.4,94.606 122.306,94.7 117.5,94.7
  Bottom Layer w0.508: J1302.1@115,91.1 116.95,91.1 C1302.2@118.5,92.65 ; U1301.3@125.409,96.974 125.426,96.957 127.267,96.957 127.624,96.6 C1300.2@127.7,96.6 127.7,95.843 127.694,95.838 127.694,94.794 v1(127.675,94.775)
5V0_EN_4: IC400.9 R400.1 R403.2 TP403.1 | length 10.1
  Top Layer w0.254: IC400.9@136.062,69.119 138.268,69.119 138.787,68.6 139.847,68.6 140.52,67.927 141.46,67.927 R403.2@141.787,67.6
  Top Layer w0.508: R403.2@141.787,67.6 141.787,67.354 142.085,67.056 143.218,67.056 143.387,66.887 ; 143.482,66.736 143.482,65.745 143.487,65.739 143.487,65.047 TP403.1@143.51,65.024
5V0_SYS_PGOOD: IC400.8 R404.1 TP405.1 | length 16.1
  Top Layer w0.254: R404.1@134.087,63.615 134.202,63.5 TP405.1@135.636,63.5 135.755,63.381 136.517,63.381 136.849,63.049 139.176,63.049 140.995,64.868 140.995,66.446 140.447,66.994 138.291,66.994 138.291,68.355 138.028,68.619 IC400.8@136.062,68.619
"5V PWR": C406.2 C407.2 C408.2 C409.2 C410.2 C411.2 C412.2 C501.1 IC500.3 J400.1 J400.2 J700_EncMot1.1 J700_EncMot2.1 J700_EncOdom1.1 J700_EncOdom2.1 L400.2 R401.2 R402.2 TP400.1 | length 121.5
  Top Layer w0.508: J400.2@123,80.52 125.953,80.52 126.643,79.83 C408.2@129.286,79.83 ; R402.2@123.763,75.475 123,76.238 J400.1@123,77.98 123.076,77.904 C410.2@129.286,77.904 ; C412.2@137.262,64.6 R401.2@138.862,64.6 138.862,64.321 138.303,63.762 v1(138.303,63.734) v1@138.322,63.754
  PWR w1.905: J700_EncMot1.1@116.068,68.266 115.734,68.266 113.9,70.1 113.9,82.326 115.016,83.441 120.079,83.441 J400.2@123,80.52 J400.1@123,77.98 ; J700_EncOdom1.1@132.15,112.75 134.3,114.9 146.5,114.9 147.75,113.65 147.75,112.168 147.587,112.005 147.587,108.83 147.46,108.703 147.46,107.451 147.464,107.446 147.464,104.869 146.858,104.263 146.858,89.108 147.9,88.066 147.9,83.257 144.907,80.264 v1(139.319,80.264)
  Bottom Layer w0.508: v1(138.303,63.734) 138.303,80.11 138.43,80.237 v1(138.43,80.264)
  other v1: 131.572,80.264 132.461,80.264 133.35,80.264 134.239,80.264 136.652,80.264 137.541,80.264 131.064,80.899 131.953,80.899 132.842,80.899 133.731,80.899 136.144,80.899 137.033,80.899 137.922,80.899 138.811,80.899
\M\C\L\R\_9: J900.2 MC900.7 R1001.1 | length 67.1
  Top Layer w0.254: MC900.7@141.498,97.977 141.514,97.977 142.237,98.7 v1(143.9,98.7)
  Top Layer w0.508: J900.2@125.52,59.4 127.07,57.85 140.15,57.85 145.288,62.988 145.288,71.347 145.542,71.601 v1(145.542,71.628)
  Bottom Layer w0.508: R1001.1@142.809,99.784 143.894,98.7 v1(143.9,98.7) 145.138,97.462 145.138,95.1 143.321,93.283 143.321,90.359 148.082,85.598 148.082,80.391 148.336,80.137 148.336,74.93 145.542,72.136 v1(145.542,71.628)
CAN_RX: MC900.30 U1300.2 | length 6.4
  Top Layer w0.254: U1300.2@125.409,97.156 128.345,97.156 128.99,97.8 129.76,97.8 MC900.30@130.997,96.563
CAN_TX: MC900.31 U1300.3 | length 7.1
  Top Layer w0.254: U1300.3@125.409,98.426 128.929,98.426 129.104,98.6 v1(129.2,98.6) ; v1(129.23,97.07) 129.298,97.002 129.835,97.002 130.628,96.209 MC900.31@130.643,96.209
  Bottom Layer w0.508: v1@129.2,97.1 129.21,97.11 129.21,97.117 129.2,97.127 v1(129.2,98.6)
EMA1: MC900.45 R700_EncMot1.1 R702_EncMot1.2 | length 35.1
  Top Layer w0.254: v1(134.161,86.409) 134.161,86.506 133.895,86.771 133.895,88.126 133.941,88.171 133.941,88.298 MC900.45@134.533,88.89
  Bottom Layer w0.508: R700_EncMot1.1@118.4,66.875 R702_EncMot1.2@118.4,68.45 118.65,68.45 119.8,69.6 119.8,71.6 125.2,77 125.2,84.179 129.413,88.392 132.961,88.392 133.374,87.979 133.374,87.125 133.417,87.125 134.133,86.409 v1(134.161,86.409)
EMA2: MC900.12 R700_EncMot2.1 R702_EncMot2.2 | length 41.8
  Top Layer w0.254: MC900.12@139.73,99.745 140.82,100.834 140.82,102.162 v1(140.814,102.167)
  Bottom Layer w0.254: R700_EncMot2.1@118.45,82.4 R702_EncMot2.2@118.45,83.9 118.45,83.956 122.006,87.512 123.434,87.512 124.232,88.31 124.232,88.429 124.261,88.587 ccw(c123,88.82) 124.276,88.691 124.335,89.26 129.9,94.825 129.9,96.771 129.959,96.83 129.959,97.398 129.9,97.458 129.9,103.569 130.649,104.318 136.899,104.318 139.038,102.178 140.803,102.178 v1(140.814,102.167)
EMB1: MC900.47 R701_EncMot1.1 R703_EncMot1.2 | length 42.1
  Top Layer w0.254: v1(134.732,85.668) 134.732,85.764 134.847,85.879 134.847,86.694 134.575,86.965 134.575,87.503 135.24,88.167 MC900.47@135.24,88.183
  Bottom Layer w0.508: R701_EncMot1.1@118.4,62.15 R703_EncMot1.2@118.4,60.55 118.689,60.55 124.334,66.194 126.111,67.972 126.111,83.566 130.048,87.503 131.851,87.503 133.299,86.055 133.299,86.023 133.775,85.547 134.583,85.547 134.704,85.668 v1(134.732,85.668)
EMB2: MC900.11 R701_EncMot2.1 R703_EncMot2.2 | length 51.1
  Top Layer w0.254: MC900.11@140.084,99.391 140.084,99.407 140.753,100.076 140.753,100.106 141.567,100.92 141.567,102.697 141.1,103.165 v1(141.1,103.2)
  Bottom Layer w0.254: R703_EncMot2.2@118.418,75.841 R701_EncMot2.1@118.418,77.641 121.768,80.992 121.768,82.092 124.925,85.249 124.925,89.151 130.226,94.452 130.3,94.526 130.315,96.683 130.315,97.546 130.3,99.866 130.3,103.25 130.374,103.325 130.935,103.885 136.613,103.885 139.023,101.475 141.075,101.475 141.081,101.481 141.098,101.481 141.5,101.883 141.5,102.704 141.1,103.104 v1(141.1,103.2)
EOA1: MC900.46 R700_EncOdom1.1 R702_EncOdom1.2 | length 30.3
  Top Layer w0.254: MC900.46@134.886,88.537 135.478,89.129 135.478,89.144 135.946,89.612 135.946,89.732 v1(136.014,89.8)
  Top Layer w0.508: R700_EncOdom1.1@130.7,109.2 R702_EncOdom1.2@132.3,109.2 134.1,107.4 134.1,104.2 131.294,101.394 131.069,101.394 v1(131.05,101.375)
  Bottom Layer w0.254: v1(131.05,101.375) 133.925,98.5 136.482,98.5 136.752,98.23 136.77,98.23 138.25,96.75 138.25,91.95 136.1,89.8 v1(136.014,89.8)
EOA2: MC900.13 R700_EncOdom2.1 R702_EncOdom2.2 | length 14.9
  Top Layer w0.254: MC900.13@139.377,100.099 139.377,100.106 140.343,101.072 140.343,101.669 140.128,101.883 140.128,102.451 140.343,102.665 140.343,104.416 v1(140.3,104.459)
  Top Layer w0.508: v1(145.948,108.147) 145.973,108.147 145.973,109.023 R700_EncOdom2.1@146.15,109.2 R702_EncOdom2.2@147.8,109.2
  Bottom Layer w0.508: v1(140.3,104.459) 140.319,104.478 140.616,104.478 144.284,108.147 v1(145.948,108.147)
EOB1: MC900.48 R701_EncOdom1.1 R703_EncOdom1.2 | length 31.6
  Top Layer w0.254: R701_EncOdom1.1@125.9,109.2 125.9,104.9 126.5,104.3 126.836,104.3 v1(130.986,100.15) ; MC900.48@135.143,87.379 MC900.48@135.593,87.83 135.593,86.377 135.607,86.363 135.607,86.118 v1(135.675,86.05)
  Top Layer w0.508: 124.2,109.25 125.9,109.25
  Bottom Layer w0.508: v1(130.986,100.15) 130.975,100.139 130.975,91.724 135.656,87.043 135.656,86.069 v1(135.675,86.05)
EOB2: MC900.14 R701_EncOdom2.1 R703_EncOdom2.2 | length 11.6
  Top Layer w0.254: MC900.14@139.023,100.452 139.023,100.468 139.772,101.216 139.772,103.634 139.507,103.898 139.507,104.464 v1(139.439,104.532)
  Top Layer w0.508: v1(138.649,107.776) 138.669,107.795 138.669,108.319 R703_EncOdom2.2@139.55,109.2 R701_EncOdom2.1@141.25,109.2
  Bottom Layer w0.508: v1(138.649,107.776) 138.649,105.814 138.751,105.712 138.751,105.247 139.439,104.559 v1(139.439,104.532)
FB_4: C412.1 IC400.7 R401.1 R405.2 TP404.1 | length 6.6
  Top Layer w0.254: IC400.7@135.662,67.956 137.357,67.956 R405.2@137.562,67.75 137.262,67.45 C412.1@137.262,66.2 R401.1@138.862,66.2 138.914,66.148 TP404.1@140.227,66.148